# EAGLE board EMG_FSR (EAGLE 9.6.2)

Size 20 x 50 mm. Coordinates in mm from the lower left corner, seen from the top.
Outline: 0,0 20,0 20,50 0,50 0,0
Copper layers (1*16): Top 0.035mm / dielectric 1.5mm / Bottom 0.035mm
Design rules "default": minimum track width 6mil, minimum drill 0.35mm, track to track 6mil, track to pad 6mil, pad to pad 6mil, via to via 6mil, smd to smd 6mil, copper to edge 40mil, drill to drill 6mil, minimum pad ring 10mil, minimum via ring 8mil, stop-mask expansion 4mil, vias tented up to drill 0mil, thermal gap 10mil

## Footprints (pad centres in the part's own frame; a part is rotated, then mirrored left to right if it is on the bottom)
1,6/0,8 = drill 0.813 pad 1.6 octagon: 1 0,0
C0603K = smd 1.05 x 1.08: 1 -0.875,0; 2 0.875,0
C0402K = smd 0.925 x 0.74: 1 -0.6,0; 2 0.6,0
C1206 = smd 1.6 x 1.8: 1 -1.4,0; 2 1.4,0
C0805 = smd 1.3 x 1.5: 1 -0.95,0; 2 0.95,0
SOIC127P600X175-8N = smd 1.5 x 0.65: 1 -2.7,1.905; 2 -2.7,0.635; 3 -2.7,-0.635; 4 -2.7,-1.905; 5 2.7,-1.905; 6 2.7,-0.635; 7 2.7,0.635; 8 2.7,1.905
SOT95P280X100-5N = smd 1.15 x 0.6: 1 -1.25,0.95; 2 -1.25,0; 3 -1.25,-0.95; 4 1.25,-0.95; 5 1.25,0.95
SOIC127P600X175-8N' = smd 1.528 x 0.65: 1 -2.711,1.905; 2 -2.711,0.635; 3 -2.711,-0.635; 4 -2.711,-1.905; 5 2.711,-1.905; 6 2.711,-0.635; 7 2.711,0.635; 8 2.711,1.905
SMD1,27-2,54 = smd 1.27 x 2.54: 1 0,0
R0402 = smd 0.7 x 0.9: 1 -0.65,0; 2 0.65,0
R0805 = smd 1.3 x 1.5: 1 -0.95,0; 2 0.95,0
R0201 = smd 0.28 x 0.43: 1 -0.255,0; 2 0.255,0
R1005 = smd 0.7 x 0.9: 1 -0.65,0; 2 0.65,0
R0603 = smd 1 x 1.1: 1 -0.85,0; 2 0.85,0
RESC1005X40N = smd 0.51 x 0.6: 1 -0.445,0; 2 0.445,0
RESC0402X40N = smd 0.51 x 0.6: 1 -0.465,0; 2 0.465,0
SOP65P640X120-14N = smd 1.57 x 0.41: 1 -2.87,1.95; 2 -2.87,1.3; 3 -2.87,0.65; 4 -2.87,0; 5 -2.87,-0.65; 6 -2.87,-1.3; 7 -2.87,-1.95; 8 2.87,-1.95; 9 2.87,-1.3; 10 2.87,-0.65; 11 2.87,0; 12 2.87,0.65; 13 2.87,1.3; 14 2.87,1.95
EMG_VIA = drill 3 pad 6.15: P$1 0,0

## Placement (x,y rotation side)
AMP_OUT  [1,6/0,8]  12.47,1.83 0 top
C1  10uF  [C0603K]  -16.51,38.1 0 top  (outside the outline)
C2  10pF  [C0402K]  -33.02,46.99 0 top  (outside the outline)
C3  10uF  [C0402K]  -38.1,46.99 0 top  (outside the outline)
C4  3.3nF  [C1206]  3.31,17.32 90 bottom
C5  3.3nF  [C1206]  3.31,10.47 90 bottom
C6  22nF  [C0805]  -36.83,13.97 0 top  (outside the outline)
C7  22nF  [C0805]  -43.18,13.97 0 top  (outside the outline)
C8  3.3nF  [C1206]  -16.51,13.97 0 top  (outside the outline)
C9  3.3nF  [C1206]  -22.86,13.97 0 top  (outside the outline)
EMG_BASIC  [1,6/0,8]  -29.21,36.83 0 top  (outside the outline)
EMG_OUT  [1,6/0,8]  13.87,47.67 180 top
EMGOUT  [1,6/0,8]  4.59,1.91 0 top
FSR_OUT  [1,6/0,8]  11.41,47.91 0 top
GND  0V  [1,6/0,8]  8.86,48.01 180 top
HI_PASS  [1,6/0,8]  7.3,2.09 180 top
IC1  TC7660SEOA  [SOIC127P600X175-8N]  10.13,33.82 0 top
IC2  AD8677AUJZ-REEL7  [SOT95P280X100-5N]  4.64,25.07 0 top
IC3  INA118U_2K5  [SOIC127P600X175-8N']  14.45,24.82 0 top
LO_PASS  [1,6/0,8]  9.75,1.91 0 top
PAD1  [SMD1,27-2,54]  17.68,26.67 270 bottom
PAD2  [SMD1,27-2,54]  17.68,23.48 270 bottom
R1  16K  [R0402]  -33.02,26.67 0 top  (outside the outline)
R2  24K  [R0402]  -38.1,26.67 0 top  (outside the outline)
R3  787K  [R0805]  -30.48,13.97 0 top  (outside the outline)
R4  4.7K  [R0402]  -27.94,26.67 0 top  (outside the outline)
R5  1K  [R0201]  -50.8,33.02 0 top  (outside the outline)
R6  24K  [R0201]  -36.83,33.02 0 top  (outside the outline)
R7  100K  [R1005]  -22.86,26.67 0 top  (outside the outline)
R8  68K  [R0201]  -41.91,33.02 0 top  (outside the outline)
R9  68K  [R0201]  -46.99,33.02 0 top  (outside the outline)
R10  51K  [R0201]  -43.18,26.67 0 top  (outside the outline)
R11  390K  [R0603]  -49.53,20.32 0 top  (outside the outline)
R12  390K  [R0603]  -16.51,26.67 0 top  (outside the outline)
R13  16K  [R0201]  -48.26,26.67 0 top  (outside the outline)
R14  51K  [R0201]  -53.34,26.67 0 top  (outside the outline)
R15  68K  [R0201]  -16.51,33.02 0 top  (outside the outline)
R16  68K  [R0201]  -21.59,33.02 0 top  (outside the outline)
R17  24K  [R0201]  -26.67,33.02 0 top  (outside the outline)
R18  75K  [R0201]  -31.75,33.02 0 top  (outside the outline)
R19  ERJ-2RKF1500X  [RESC1005X40N]  -36.83,52.07 0 top  (outside the outline)
R20  RESC0402X40N  [RESC0402X40N]  3.57,48.03 270 top
R22  ERJ-2RKF1500X  [RESC1005X40N]  -43.18,52.07 0 top  (outside the outline)
RED  RESC0402X40N  [RESC0402X40N]  1.38,47.78 270 top
U$1  TLC2274-HT  [SOP65P640X120-14N]  10.18,16.58 0 top
U$2  EMG_VIA  [EMG_VIA]  10.06,7.5 0 top
U$3  EMG_VIA  [EMG_VIA]  9.94,42.31 0 top
VCC  +5V  [1,6/0,8]  6.56,47.99 0 top
VCC-  -5V  [1,6/0,8]  15.22,1.99 0 top

## Library data of the parts
AMP_OUT EMG_BASIC EMG_OUT EMGOUT FSR_OUT GND HI_PASS LO_PASS PAD1 PAD2 VCC VCC- = wirepad
C1-C9 = rcl; SPICEPREFIX: C
IC1 = TC7660SEOA; ARROW_PART_NUMBER: TC7660SEOA; ARROW_PRICE-STOCK: https://www.arrow.com/en/products/tc7660seoa/microchip-technology; DESCRIPTION: DC-TO-DC VOLTAGE CONVERTER; HEIGHT: 1.75mm; MANUFACTURER_NAME: Microchip; MANUFACTURER_PART_NUMBER: TC7660SEOA; MOUSER_PART_NUMBER: 579-TC7660SEOA; MOUSER_PRICE-STOCK: https://www.mouser.co.uk/ProductDetail/Microchip-Technology/TC7660SEOA?qs=cQYLKLPzRJl3hJI5k2EAHg%3D%3D
IC2 = AD8677AUJZ-REEL7; ARROW_PART_NUMBER: AD8677AUJZ-REEL7; ARROW_PRICE-STOCK: https://www.arrow.com/en/products/ad8677aujz-reel7/analog-devices; DESCRIPTION: Precision Amplifiers 130uV Max Offset VTG; HEIGHT: 1mm; MANUFACTURER_NAME: Analog Devices; MANUFACTURER_PART_NUMBER: AD8677AUJZ-REEL7; MOUSER_PART_NUMBER: 584-AD8677AUJZ-R7; MOUSER_PRICE-STOCK: https://www.mouser.co.uk/ProductDetail/Analog-Devices/AD8677AUJZ-REEL7?qs=%2FtpEQrCGXCxIKHu%2FfOAijA%3D%3D
IC3 = INA118U_2K5; ARROW_PART_NUMBER: INA118U/2K5; ARROW_PRICE-STOCK: https://www.arrow.com/en/products/ina118u2k5/texas-instruments; DESCRIPTION: Precision, Low Power Instrumentation Amplifier; HEIGHT: 1.75mm; MANUFACTURER_NAME: Texas Instruments; MANUFACTURER_PART_NUMBER: INA118U/2K5; MOUSER_PART_NUMBER: 595-INA118U/2K5; MOUSER_PRICE-STOCK: https://www.mouser.co.uk/ProductDetail/Texas-Instruments/INA118U-2K5?qs=VBduBm9rCJRVtE6eJbSA%2Fg%3D%3D
R1 R2 R4 R7 R11 R12 = adafruit
R3 R5 R6 R8-R10 R13-R18 = rcl; SPICEPREFIX: R
R19 R22 = ERJ-2RKF1500X; DESCRIPTION: 150 Ohms ±1% 0.1W, 1/10W Chip Resistor 0402 (1005 Metric) Automotive AEC-Q200 Thick Film; DIGI-KEY_PART_NUMBER: P150LCT-ND; MF: Panasonic Electronic; MP: ERJ-2RKF1500X; PACKAGE: 1005 Panasonic Electronic Components; PURCHASE-URL: https://pricing.snapeda.com/search/part/ERJ-2RKF1500X/?ref=eda
R20 RED = RESC0402X40N; A_MAX: 0.4; A_MIN: 0.4; A_NOM: 0.4; D_MAX: 1.1; D_MIN: 0.95; D_NOM: 1.0; E_MAX: 0.55; E_MIN: 0.45; E_NOM: 0.5; L1_MAX: 0.3; L1_MIN: 0.15; L1_NOM: 0.25; L_MAX: 0.3; L_MIN: 0.15; L_NOM: 0.25; MANUFACTURER: KOA; STANDARD: IPC 7351B
U$1 = TLC2274-HT
U$2 U$3 = EMG_VIA

## Nets
+5V: IC1.8 IC2.5 IC3.7 PAD2.1 R1.2 R22.2 U$1.4 VCC.1
-5V: C3.1 IC1.5 IC2.2 IC3.4 R20.2 U$1.11 VCC-.1
EMG_BASIC: C9.2 EMG_BASIC.1 EMG_OUT.1 R17.1 U$1.8
FSR_OUT: FSR_OUT.1 IC2.1 R2.1
GND: C5.1 C8.2 GND.1 IC1.3 R3.2 R10.2 R11.1 R14.1 R18.1 R19.2 RED.2 U$1.12
N$1: C1.1 IC1.2
N$2: C1.2 IC1.4
N$3: C2.1 IC3.2 U$2.P$1
N$4: R22.1 RED.1
N$5: C2.2 IC3.3 U$3.P$1
N$6: R19.1 R20.1
N$7: IC2.4 PAD1.1 R2.2
N$10: IC2.3 R1.1 R3.1
N$11: C3.2 IC3.5
N$12: IC3.1 R4.1
N$13: IC3.8 R4.2
N$14: C4.2 LO_PASS.1 R5.1 R6.1 U$1.1
N$17: AMP_OUT.1 R7.1 R16.2 U$1.14
N$18: R5.2 R7.2 U$1.13
N$19: R6.2 R10.1 U$1.2
N$20: C5.2 R9.1 U$1.3
N$21: C4.1 R8.1 R9.2
N$23: C6.1 C7.2 R12.2
N$24: C6.2 R11.2 U$1.5
N$26: R13.2 R14.2 U$1.6
N$27: C9.1 R15.1 R16.1
N$28: C8.1 R15.2 U$1.10
N$30: R17.2 R18.2 U$1.9
PIN7: HI_PASS.1 R8.2 R12.1 R13.1 U$1.7
RAWEMG: C7.1 EMGOUT.1 IC3.6

## Tracks (layer width: path | path; a pad name or v marks a point on that pad's centre or on a via)
+5V  (7 unrouted)
-5V  (6 unrouted)
EMG_BASIC  (4 unrouted)
FSR_OUT  (2 unrouted)
GND  (11 unrouted)
N$1  (1 unrouted)
N$2  (1 unrouted)
N$3  (2 unrouted)
N$4  (1 unrouted)
N$5  (2 unrouted)
N$6  (1 unrouted)
N$7  (2 unrouted)
N$10  (2 unrouted)
N$11  (1 unrouted)
N$12  (1 unrouted)
N$13  (1 unrouted)
N$14  (4 unrouted)
N$17  (3 unrouted)
N$18  (2 unrouted)
N$19  (2 unrouted)
N$20  (2 unrouted)
N$21  (2 unrouted)
N$23  (2 unrouted)
N$24  (2 unrouted)
N$26  (2 unrouted)
N$27  (2 unrouted)
N$28  (2 unrouted)
N$30  (2 unrouted)
PIN7  (4 unrouted)
RAWEMG  (2 unrouted)